# Allegro board TNSP_USBHUB3.brd
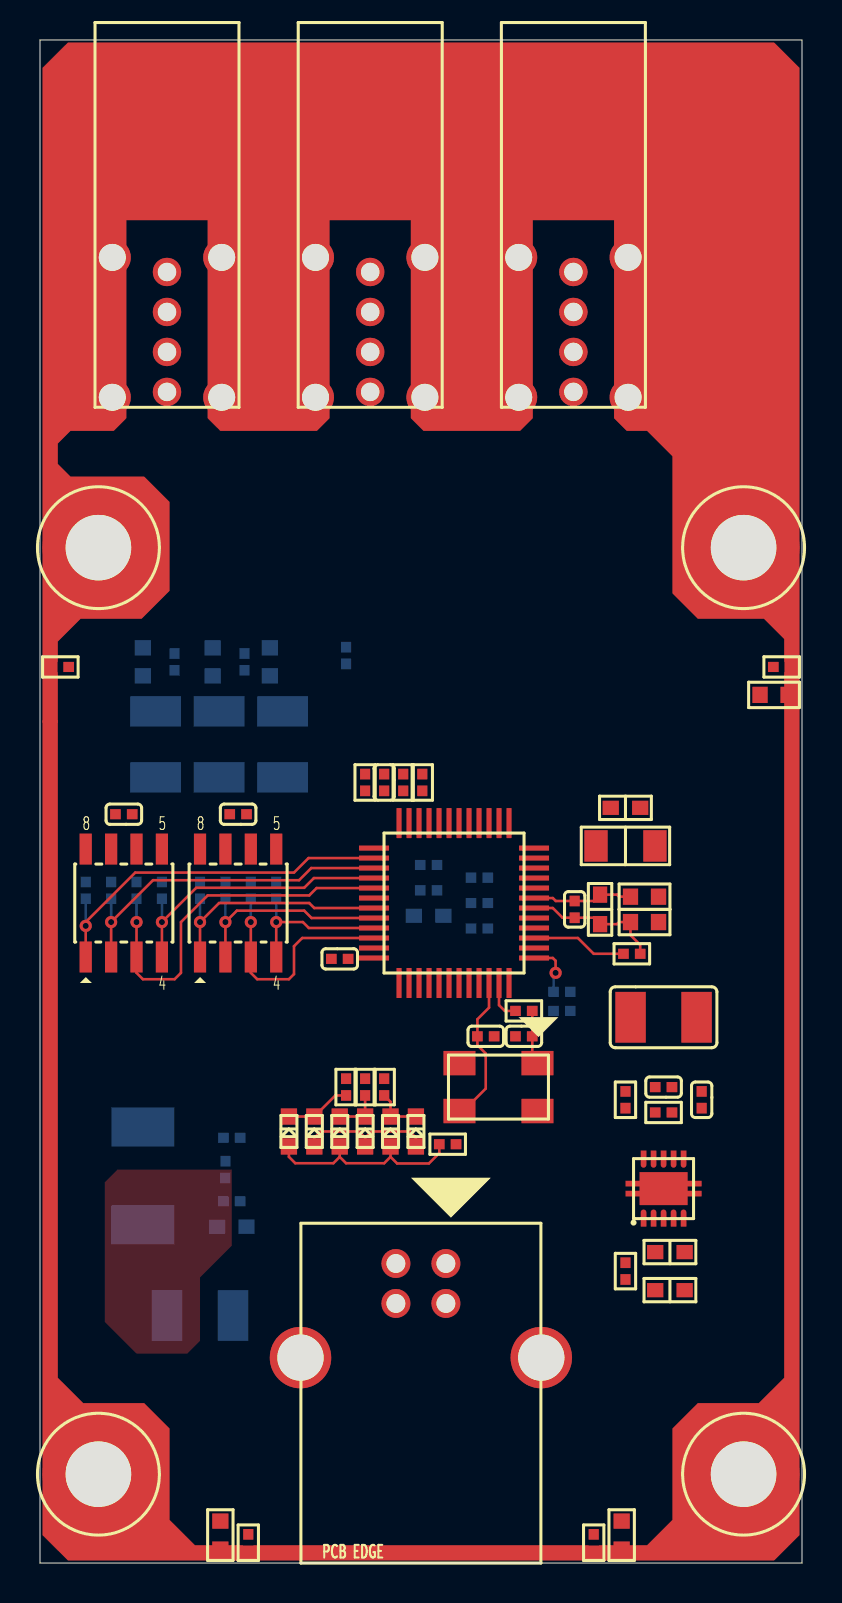
[diagram p0: board, top side]
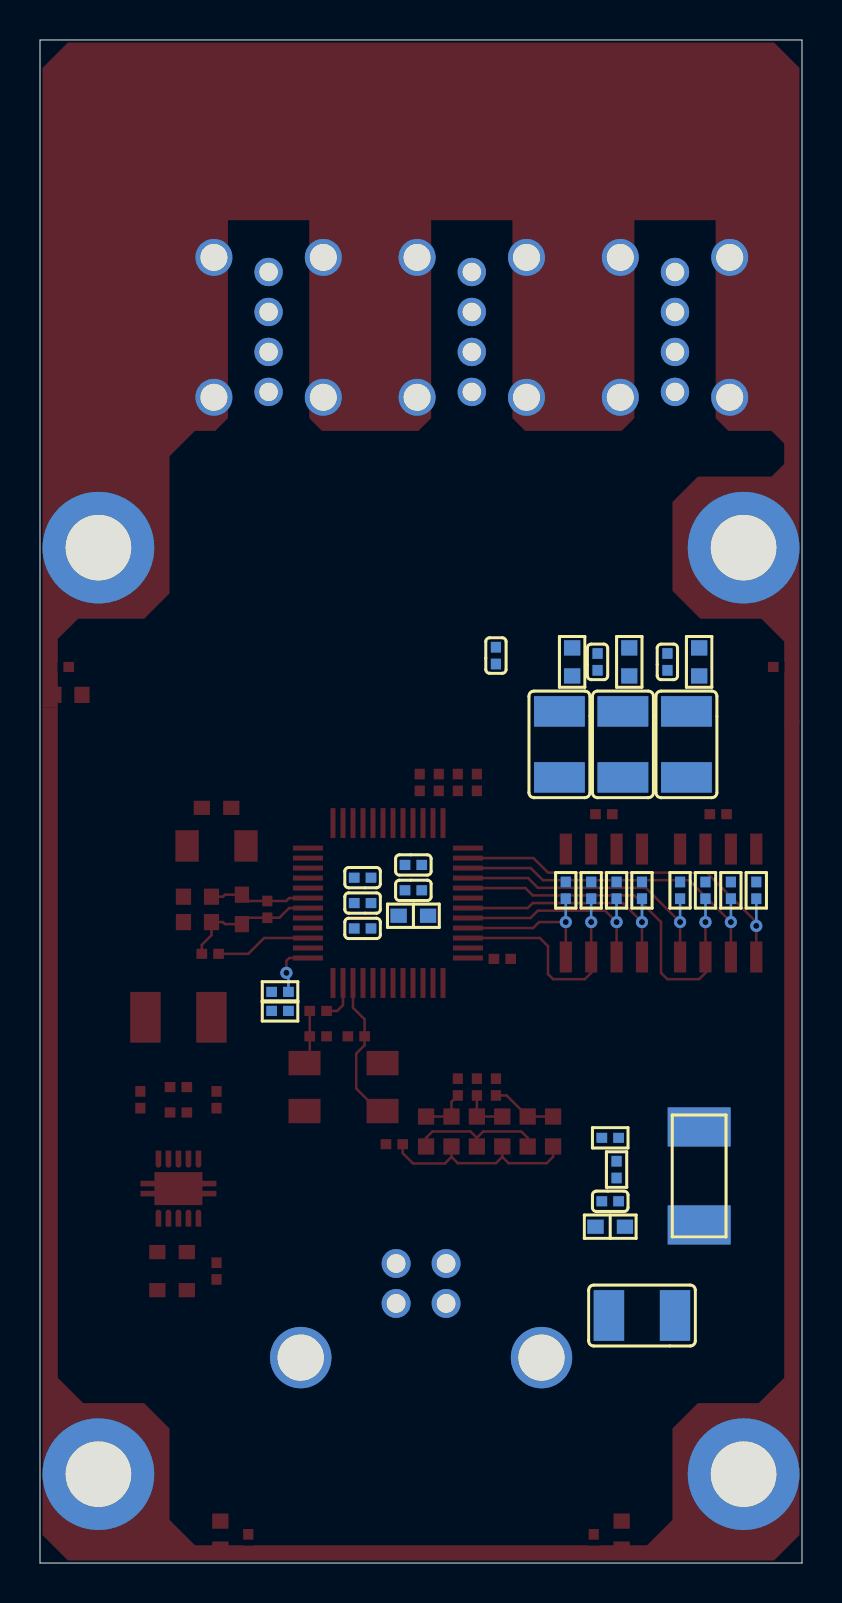
[diagram p1: board, bottom side, seen from below]

Outline 38.1 x 76.2 mm; copper layers: TOP, L2_GND, L3_PWR, BOTTOM. Coordinates in mm from the lower left corner of the outline.
Outline path: 0,76.2 0,0 38.1,0 38.1,76.2 0,76.2

## Design rules (mm)
net group GND: nets CHASSIS_GND GND
net group USB_D1: nets USB_D1_N USB_D1_P
net group USB_D2: nets USB_D2_N USB_D2_P
net group USB_D3: nets USB_D3_N USB_D3_P
net group USB_D4: nets USB_D4_N USB_D4_P
net group USB_UP: nets USB_UP_N USB_UP_P
net group ANALOG SIGNALS: nets AVDD_2V5 AVSS_GND RREF XTAL1 XTAL2 XTAL2_R
net group MICS. SIGNALS: nets BUS_B LDO_FB LDO_PG LDO_SS LED1 LED1_R LED2 LED2_R LED3 LED3_R LED_AMBER LED_GREEN SYSRST_L USB1_CS_L USB1_EN_L USB2_CS_L USB2_EN_L USB3_CS_L USB3_EN_L USB4_CS_L USB4_EN_L
net group POWER: nets VBUS_MON VDD_3V3 VDDOUT_2V5 VFIL1_5V0 VFIL2_5V0 VFIL3_5V0 VPORT1_5V0 VPORT2_5V0 VPORT3_5V0 VPORT_5V0

## Placement (name value [footprint] x y rotation side)
C1  12pF  [0402C]  22.29 26.35 180 top
C2  10uF  [0603C]  9.59 16.83 180 bottom
C3  1uF  [0402C]  9.59 18.1 180 bottom
C4  12pF  [0402C]  24.19 26.35 0 top
C5  1uF  [0402C]  15.3 45.4 90 bottom
C6  1uF  [0402C]  10.22 45.09 90 bottom
C7  10uF  [0603C]  19.43 32.39 180 bottom
C8  1uF  [0402C]  19.43 33.66 180 bottom
C9  1uF  [0402C]  14.99 30.23 0 top
C10  1uF  [0402C]  19.43 34.92 180 bottom
C11  1uF  [0402C]  6.73 45.09 90 bottom
C13  22uF  [1206C]  29.27 35.88 180 top
C14  4.7uF  [0603C]  29.27 37.78 180 top
C15  4.7uF  [0603C]  28 32.7 90 top
C16  1uF  [0402C]  26.73 32.7 90 top
C17  1uF  [0402C]  17.21 39.05 270 top
C18  1uF  [0402C]  9.91 37.47 180 top
C19  100uF  [1210C]  8.95 40.96 270 bottom
C20  100uF  [1210C]  12.13 40.96 270 bottom
C21  0.1uF  [0402C]  21.97 33.02 0 bottom
C22  0.1uF  [0402C]  21.97 31.75 0 bottom
C23  0.1uF  [0402C]  21.97 34.29 0 bottom
C24  1uF  [0402C]  4.19 37.47 180 top
C26  100uF  [1210C]  5.78 40.96 270 bottom
C27  100uF  [1210C]  8 12.38 0 bottom
C28  1uF  [0402C]  31.18 23.81 180 top
C29  100uF  [1210C]  31.18 27.3 0 top
C30  10uF  [0603C]  31.5 13.65 180 top
C31  10uF  [0603C]  31.5 15.56 180 top
C32  DNL_1n0F  [0402C]  33.08 23.18 270 top
CN1  USB_B_RECP  [MOLEX_670688011]  19.04 10.28 0 top
CN2  USB_A_VERT_RECP  [MOLEX_672983091]  26.67 58.59 0 top
CN3  USB_A_VERT_RECP  [MOLEX_672983091]  16.51 58.59 0 top
CN4  USB_A_VERT_RECP  [MOLEX_672983091]  6.35 58.59 0 top
D1  LED_GRN_0603  [SMTLED_0603]  18.8 21.59 90 top
D2  LED_GRN_0603  [SMTLED_0603]  17.53 21.59 90 top
D3  LED_GRN_0603  [SMTLED_0603]  16.26 21.59 90 top
D4  LED_GRN_0603  [SMTLED_0603]  14.99 21.59 90 top
D5  LED_GRN_0603  [SMTLED_0603]  13.72 21.59 90 top
D6  LED_GRN_0603  [SMTLED_0603]  12.45 21.59 90 top
F1  2A_125V  [FUSE_SMD]  5.14 19.37 90 bottom
FB1  60OHM_100MHZ_1A  [0603L]  30.23 33.34 180 top
FB2  60OHM_100MHZ_1A  [0603L]  30.23 32.07 180 top
FB4  60OHM_100MHZ_1A  [0603L]  11.49 45.09 90 bottom
FB5  60OHM_100MHZ_1A  [0603L]  36.7 43.43 180 top
FB6  60OHM_100MHZ_1A  [0603L]  8.64 45.09 90 bottom
FB7  60OHM_100MHZ_1A  [0603L]  9.02 1.4 90 top
FB8  60OHM_100MHZ_1A  [0603L]  29.08 1.4 90 top
FB9  60OHM_100MHZ_1A  [0603L]  5.14 45.09 90 bottom
MH1  DNL  [MH_129X220_PTH]  2.92 4.45 0 top
MH2  DNL  [MH_129X220_PTH]  35.18 4.45 0 top
MH3  DNL  [MH_129X220_PTH]  2.92 50.8 0 top
MH4  DNL  [MH_129X220_PTH]  35.18 50.8 0 top
R1  33.2  [0402R]  24.19 27.62 180 top
R2  10K  [0402R]  9.27 19.69 270 bottom
R3  15K  [0402R]  9.59 21.27 180 bottom
R4  0  [0402R]  26.1 28.57 0 bottom
R5  DNL_0  [0402R]  26.1 27.62 180 bottom
R6  10K  [0402R]  20.38 20.96 180 top
R7  470  [0402R]  17.21 23.81 90 top
R8  470  [0402R]  16.26 23.81 90 top
R9  470  [0402R]  15.3 23.81 90 top
R11  2.43K  [0402R]  29.59 30.48 0 top
R12  10K  [0402R]  16.26 39.05 90 top
R13  510K  [0402R]  11.81 33.66 90 bottom
R14  510K  [0402R]  8 33.66 90 bottom
R15  10K  [0402R]  10.54 33.66 90 bottom
R16  10K  [0402R]  9.27 33.66 90 bottom
R17  510K  [0402R]  6.1 33.66 90 bottom
R18  510K  [0402R]  2.29 33.66 90 bottom
R19  10K  [0402R]  4.83 33.66 90 bottom
R20  10K  [0402R]  3.56 33.66 90 bottom
R21  3.57K  [0402R]  29.27 23.18 90 top
R22  1.15K  [0402R]  31.18 22.54 180 top
R23  10K  [0402R]  29.27 14.61 270 top
R24  0  [0402R]  18.16 39.05 270 top
R25  0  [0402R]  19.11 39.05 270 top
R26  0  [0402R]  10.41 1.02 270 top
R27  0  [0402R]  27.69 1.02 270 top
R28  0  [0402R]  37.08 44.83 0 top
R29  0  [0402R]  1.02 44.83 180 top
U1  UPD720114_QFP  [NEC_TQFP_48]  20.7 33.02 90 top
U2  AP1212  [DIODES_SOP_8L]  9.91 33.02 0 top
U3  AP1212  [DIODES_SOP_8L]  4.19 33.02 0 top
U4  TPS74801  [TI_SON_10]  31.18 18.73 0 top
X1  30MHZ_50PPM  [XTAL_VXM5]  22.92 23.81 180 top

## Library data of the parts
C1 C4 = C_12PF_0402_50V_5P_1500-1206
C2 C7 C30 C31 = C_10UF_0603_6V3_20P_1500-1141
C3 C5 C6 C8-C11 C16-C18 C24 C28 = C_1UF_0402_6V3_10P_1500-1146
C13 = C_22UF_1206_6V3_10P_1500-1097
C14 C15 = C_4U7F_0603_6V3_15P_1500-1207
C19 C20 C26 C27 C29 = C_100UF_1210_6V3_20P_1500-1194
C21-C23 = C_0U1F_0402_16V_10P_1500-1135
C32 = C_0402_16V_20P_X7R_1n0F
CN1 = 3000-1393_USB_B_RECP
CN2-CN4 = 3000-1394_USB_A_VERT_RECP
D1-D6 = LED_0603_GRN_3100-1045
F1 = FUSE_2A_125V_NANO_2300-1027
FB1 FB2 FB4-FB9 = FB_0603_60OHM_1A_2100-1019
MH1-MH4 = MH_129x220_PTH
R1 = R_33R2_0402_1P_1000-1380
R2 R6 R12 R15 R16 R19 R20 R23 = R_10K_0402_1P_1000-1234
R3 = R_15K_0402_5P_1000-1505
R4 R5 R24-R29 = R_0_0402_5P_1000-1377
R7-R9 = R_470_0402_5P_1000-1506
R11 = R_2K43_0402_1P_1000-1503
R13 R14 R17 R18 = R_510K_0402_5P_1000-1504
R21 = R_3K57_0402_1P_1000-1344
R22 = R_1K15_0402_1P_1000-1345
U1 = 4000-1384_UPD720114_TQFP48
U2 U3 = 4000-1385_AP1212L_SOL8L
U4 = IC_TPS74801_SON10_3X3_ADJ_REG
X1 = XTAL_30MHZ_4P_VXM5_1900-1069

## Footprints (pads in the part's own frame, mm; a bottom-side part is the same pattern mirrored in y, then rotated)
0402C
  rect 0.533x0.508 smd: 1(0.419,0) 2(-0.419,0)
0402R
  rect 0.533x0.508 smd: 1(0.419,0) 2(-0.419,0)
0603C
  rect 0.813x0.711 smd: 1(0.737,0) 2(-0.737,0)
0603L
  rect 0.762x0.813 smd: 1(-0.701,0) 2(0.701,0)
1206C
  rect 1.168x1.575 smd: 1(1.473,0) 2(-1.473,0)
1210C
  rect 1.524x2.54 smd: 1(-1.651,0) 2(1.651,0)
DIODES_SOP_8L
  rect 0.61x1.549 smd: 1(-1.905,-2.7) 2(-0.635,-2.7) 3(0.635,-2.7) 4(1.905,-2.7) 5(1.905,2.7) 6(0.635,2.7) 7(-0.635,2.7) 8(-1.905,2.7)
FUSE_SMD
  rect 1.956x3.15 smd: 1(-2.451,0) 2(2.451,0)
MH_129X220_PTH
  round 5.588 hole 3.277: 1(0,0)
MOLEX_670688011
  round 1.448 hole 0.94: 1(1.25,4.709) 2(-1.25,4.709) 3(-1.25,2.71) 4(1.25,2.71)
  round 3.073 hole 2.311: 5(-6.02,0) 6(6.02,0)
MOLEX_672983091
  round 1.42 hole 0.92: 1(0,0) 2(0,2) 3(0,4) 4(0,6)
  round 1.85 hole 1.35: 5(-2.735,-0.27) 6(2.735,-0.27) 7(-2.735,6.73) 8(2.735,6.73)
NEC_TQFP_48
  rect 1.5x0.25 smd: 1(-4,2.75) 2(-4,2.25) 3(-4,1.75) 4(-4,1.25) 5(-4,0.75) 6(-4,0.25) 7(-4,-0.25) 8(-4,-0.75) 9(-4,-1.25) 10(-4,-1.75) 11(-4,-2.25) 12(-4,-2.75) 25(4,-2.75) 26(4,-2.25) 27(4,-1.75) 28(4,-1.25) 29(4,-0.75) 30(4,-0.25) 31(4,0.25) 32(4,0.75) 33(4,1.25) 34(4,1.75) 35(4,2.25) 36(4,2.75)
  rect 0.25x1.5 smd: 13(-2.75,-4) 14(-2.25,-4) 15(-1.75,-4) 16(-1.25,-4) 17(-0.75,-4) 18(-0.25,-4) 19(0.25,-4) 20(0.75,-4) 21(1.25,-4) 22(1.75,-4) 23(2.25,-4) 24(2.75,-4) 37(2.75,4) 38(2.25,4) 39(1.75,4) 40(1.25,4) 41(0.75,4) 42(0.25,4) 43(-0.25,4) 44(-0.75,4) 45(-1.25,4) 46(-1.75,4) 47(-2.25,4) 48(-2.75,4)
SMTLED_0603
  rect 0.813x0.813 smd: 1(-0.749,0) 2(0.749,0)
TI_SON_10
  custom 0.28x0.85 smd: 1(-1,-1.475) 2(-0.5,-1.475) 3(0,-1.475) 4(0.5,-1.475) 5(1,-1.475) 6(1,1.475) 7(0.5,1.475) 8(0,1.475) 9(-0.5,1.475) 10(-1,1.475)
  custom 3.8x1.65 smd: 11(0,0)
XTAL_VXM5
  rect 1.6x1.219 smd: 1(-1.951,-1.199) 2(1.951,-1.199) 3(1.951,1.199) 4(-1.951,1.199)

## Nets
AVDD_2V5: C15.1 C16.1 FB1.2 U1.17(AVDD#17) U1.19(AVDD#19)
AVSS_GND: C15.2 C16.2 FB2.2 R11.1 U1.16(AVSS(R)) U1.18(AVSS)
GND: C1.2 C2.2 C3.2 C4.2 C5.2 C6.2 C7.2 C8.2 C9.2 C10.2 C11.2 C13.2 C14.2 C17.2 C18.2 C19.2 C20.2 C21.2 C22.2 C23.2 C24.2 C26.2 C27.2 C28.2 C29.2 C30.2 C31.2 C32.2 CN1.4(GND) CN1.5(FG1) CN1.6(FG2) CN2.4(GND) CN3.4(GND) CN4.4(GND) FB2.1 FB5.2 FB7.2 FB8.2 R3.2 R5.2 R6.2 R22.2 R24.2 R25.2 R26.2 R27.2 R28.2 R29.2 U1.2(VSSREG) U1.14(TEST) U1.23(VSS#23) U1.27(VSS#27) U1.36(VSS#36) U1.42(VSS#42) U2.6(GND) U3.6(GND) U4.6(GND) U4.11(PAD)
VBUS_5V0: C2.1 C3.1 C27.1 C30.1 C31.1 CN1.1(VBUS) F1.1 R2.1 R23.1 U4.1(VIN1) U4.2(VIN2) U4.4(BIAS) U4.5(EN)
VBUS_MON: R2.2 R3.1 U1.47(VBUSM)
VDD_3V3: C7.1 C8.1 C9.1 C10.1 C28.1 C29.1 R4.1 R12.1 R13.1 R14.1 R15.1 R16.1 R17.1 R18.1 R19.1 R20.1 R21.1 U1.9(VDD33#9) U1.20(VDD33#20) U1.30(VDD33#30) U1.48(VDD33REG) U4.9(VOUT2) U4.10(VOUT1)
VDDOUT_2V5: C13.1 C14.1 C21.1 C22.1 C23.1 FB1.1 U1.1(VDD25OUT) U1.12(VDD25#12) U1.24(VDD25#24) U1.33(VDD25#33)
BUS_B: R4.2 R5.1 U1.13(BUS_B)
CHASSIS_GND: CN2.5(FG1) CN2.6(FG2) CN2.7(FG3) CN2.8(FG4) CN3.5(FG1) CN3.6(FG2) CN3.7(FG3) CN3.8(FG4) CN4.5(FG1) CN4.6(FG2) CN4.7(FG3) CN4.8(FG4) FB5.1 FB7.1 FB8.1 MH1.1 MH2.1 MH3.1 MH4.1 R26.1 R27.1 R28.1 R29.1
LDO_FB: R21.2 R22.1 U4.8(FB)
LDO_PG: R23.2 U4.3(PGD)
LDO_SS: C32.1 U4.7(SS)
LED1: R7.1 U1.6(LED1)
LED1_R: D1.2(CATHODE) D2.2(CATHODE) R7.2
LED2: R8.1 U1.5(LED2)
LED2_R: D3.2(CATHODE) D4.2(CATHODE) R8.2
LED3: R9.1 U1.4(LED3)
LED3_R: D5.2(CATHODE) D6.2(CATHODE) R9.2
LED_AMBER: D2.1(ANODE) D4.1(ANODE) D6.1(ANODE) R6.1 U1.8(AMBER)
LED_GREEN: D1.1(ANODE) D3.1(ANODE) D5.1(ANODE) U1.7(GREEN)
RREF: R11.2 U1.15(RREF)
SYSRST_L: C17.1 R12.2 U1.37(SYSRSTB)
USB1_CS_L: R15.2 U1.46(CSB1) U2.3(FLG2)
USB1_EN_L: R13.2 U1.45(PPB1) U2.4(EN2_L)
USB2_CS_L: R16.2 U1.44(CSB2) U2.2(FLG1)
USB2_EN_L: R14.2 U1.43(PPB2) U2.1(EN1_L)
USB3_CS_L: R19.2 U1.41(CSB3) U3.3(FLG2)
USB3_EN_L: R17.2 U1.40(PPB3) U3.4(EN2_L)
USB4_CS_L: R20.2 U1.39(CSB4) U3.2(FLG1)
USB4_EN_L: R18.2 U1.38(PPB4) U3.1(EN1_L)
USB_D1_N: CN2.2(D_N) U1.25(DM1)
USB_D1_P: CN2.3(D_P) U1.26(DP1)
USB_D2_N: CN3.2(D_N) U1.28(DM2)
USB_D2_P: CN3.3(D_P) U1.29(DP2)
USB_D3_N: CN4.2(D_N) U1.31(DM3)
USB_D3_P: CN4.3(D_P) U1.32(DP3)
USB_D4_N: R25.1 U1.34(DM4)
USB_D4_P: R24.1 U1.35(DP4)
USB_UP_N: CN1.2(D_N) U1.21(DMU)
USB_UP_P: CN1.3(D_P) U1.22(DPU)
VFIL1_5V0: C5.1 CN2.1(VBUS) FB4.2
VFIL2_5V0: C6.1 CN3.1(VBUS) FB6.2
VFIL3_5V0: C11.1 CN4.1(VBUS) FB9.2
VPORT1_5V0: C20.1 FB4.1 U2.5(OUT2)
VPORT2_5V0: C19.1 FB6.1 U2.8(OUT1)
VPORT3_5V0: C26.1 FB9.1 U3.5(OUT2)
VPORT_5V0: C18.1 C24.1 F1.2 U2.7(IN) U3.7(IN)
XTAL1: C1.1 U1.10(X1) X1.3(X2)
XTAL2: R1.1 U1.11(X2)
XTAL2_R: C4.1 R1.2 X1.1(X1)

Pads without a net: U1 3; U3 8; X1 2 4

## Via types
v1: diameter 0.61, hole 0.305, TOP to BOTTOM, 9 vias

## Routing (per net, layer and track width the routed paths; a pad name or vN(x,y) marks a point on that pad's centre or on a via; arc(x,y) is an arc through that point)
AVDD_2V5: length 5.1
  TOP w0.127: FB1.2 28.95,33.34 28.85,33.44 C15.1 27.69,33.12 C16.1 25.79,33.12 25.64,33.27 U1.19
AVSS_GND: length 7
  TOP w0.127: R11.1 30.01,30.92 29.52,31.41 FB2.2 28.95,32.07 28.85,31.97 C15.2 27.69,32.28 C16.2 26.13,32.28 25.64,32.77 U1.18
BUS_B: length 2.7
  TOP w0.127: v1(25.78,29.53) 25.78,30.13 25.64,30.27 U1.13
  BOTTOM w0.127: v1(25.78,29.53) 25.68,29.43 R4.2
LED1_R: length 2.5
  TOP w0.127: D1.2 D2.2 17.53,23.08 R7.2
LED2_R: length 2.3
  TOP w0.127: R8.2 D3.2 D4.2
LED3_R: length 3.3
  TOP w0.127: R9.2 14.77,23.39 D5.2 D6.2
LED_AMBER: length 10.4
  TOP w0.127: 14.99,20.32 15.3,20 17.21,20 17.53,20.32 ; 14.99,20.32 14.67,20 12.76,20 12.45,20.32 D6.1 ; 14.99,20.32 D4.1 ; R6.1 19.96,20.51 19.44,19.99 17.86,19.99 17.53,20.32 ; 17.53,20.32 D2.1
LED_GREEN: length 6.9
  TOP w0.127: D3.1 16.26,21.27 ; 16.26,21.27 16.57,21.59 18.48,21.59 18.8,21.27 D1.1 ; 16.26,21.27 15.94,21.59 14.03,21.59 13.72,21.27 D5.1
RREF: length 4.8
  TOP w0.127: U1.15 26.9,31.27 27.69,30.48 R11.2
USB1_CS_L: length 11.7
  TOP w0.127: U1.46 13.11,31.27 12.7,30.86 12.7,29.46 12.45,29.21 10.86,29.21 10.54,29.53 U2.3 v1(10.54,32.07)
  BOTTOM w0.127: R15.2 v1(10.54,32.07)
USB1_EN_L: length 7.9
  TOP w0.127: U1.45 13.44,31.77 13.14,32.07 v1(11.81,32.07) U2.4
  BOTTOM w0.127: R13.2 v1(11.81,32.07)
USB2_CS_L: length 10.7
  TOP w0.127: U1.44 13.58,32.27 13.21,32.64 9.84,32.64 v1(9.27,32.07) U2.2
  BOTTOM w0.127: R16.2 v1(9.27,32.07)
USB2_EN_L: length 12.1
  TOP w0.127: U1.43 13.71,32.77 13.46,33.02 8.95,33.02 v1(8,32.07) U2.1
  BOTTOM w0.127: R14.2 v1(8,32.07)
USB3_CS_L: length 19.1
  TOP w0.127: U1.41 13.83,33.77 13.46,33.4 8.38,33.4 7.05,32.07 7.05,29.53 6.73,29.21 5.14,29.21 4.83,29.53 U3.3 v1(4.83,32.07)
  BOTTOM w0.127: R19.2 v1(4.83,32.07)
USB3_EN_L: length 14.4
  TOP w0.127: U3.4 v1(6.1,32.07) 7.81,33.78 13.21,33.78 13.7,34.27 U1.40
  BOTTOM w0.127: R17.2 v1(6.1,32.07)
USB4_CS_L: length 17.2
  TOP w0.127: U1.39 13.56,34.77 12.95,34.16 5.65,34.16 v1(3.56,32.07) U3.2
  BOTTOM w0.127: R20.2 v1(3.56,32.07)
USB4_EN_L: length 18.8
  TOP w0.127: U3.1 v1(2.29,31.88) 2.29,32.07 4.76,34.54 12.7,34.54 13.43,35.27 U1.38
  BOTTOM w0.127: R18.2 v1(2.29,31.88)
XTAL1: length 7.5
  TOP w0.127: X1.3 21.16,22.61 22.29,23.74 22.29,25.49 21.87,25.91 C1.1 21.87,27.2 22.45,27.79 U1.10
XTAL2: length 2.1
  TOP w0.127: U1.11 22.95,27.91 23.24,27.62 R1.1
XTAL2_R: length 2.7
  TOP w0.127: R1.2 C4.1 24.61,25.27 X1.1

## Copper pours and planes (outline as drawn; the poured copper is in the pictures)
VBUS_5V0 on TOP: 9.59,19.69 3.87,19.69 3.24,19.05 3.24,12.07 4.83,10.48 7.37,10.48 8,11.11 8,14.29 9.59,15.88
CHASSIS_GND on TOP (solid shape): 37.97,1.4 36.7,0.13 1.4,0.13 0.13,1.4 0.13,42.16 0.89,42.16 0.89,9.27 2.16,8 5.21,8 6.48,6.73 6.48,2.16 7.75,0.89 10.16,0.89 10.16,0.86 10.67,0.86 10.67,0.89 27.43,0.89 27.43,0.86 27.94,0.86 27.94,0.89 30.35,0.89 31.62,2.16 31.62,6.73 32.89,8 35.94,8 37.21,9.27 37.21,42.8 37.97,42.8
CHASSIS_GND on TOP (solid shape): 37.97,74.8 37.97,42.8 37.21,42.8 37.21,44.58 37.24,44.58 37.24,45.09 37.21,45.09 37.21,46.23 36.2,47.24 32.89,47.24 31.62,48.51 31.62,55.37 30.35,56.64 29.34,56.64 28.7,57.28 28.7,67.18 24.64,67.18 24.64,57.28 24,56.64 19.18,56.64 18.54,57.28 18.54,67.18 14.48,67.18 14.48,57.28 13.84,56.64 9.02,56.64 8.38,57.28 8.38,67.18 4.32,67.18 4.32,57.28 3.68,56.64 1.52,56.64 0.89,56.01 0.89,54.99 1.52,54.36 5.21,54.36 6.48,53.09 6.48,48.64 5.08,47.24 2.03,47.24 0.89,46.1 0.89,45.09 0.86,45.09 0.86,44.58 0.89,44.58 0.89,42.04 0.13,42.04 0.13,74.8 1.4,76.07 36.7,76.07

## Text on the board
DXF_08MAR18: 4X | dia | PLATED PAD | .220 | KEEP OUT AREA | .129 | .320 | TYP | THRU | 2.368 | 1.825 | .415 | .175 | 0 | .115 | .135 | .535 | 1.500 | .684 | .935 | 1.270 | .063 | .160 | MAXIMUM COMPONENT  HEIGHT | .600 | MAXIMUM COMPONENT HEIGHT | SECONDARY SIDE | PRIMARY SIDE | .107
